# Altium PCB STM32.PcbDoc
Units mm, origin at the board's own origin, x right, y up, seen from the top; angles counter-clockwise.
Board outline 35 x 41 mm, 4 copper layers (Top Layer, L2 (GND), L3 (GND), Bottom Layer), stack 2.11 mm thick; 35 components, 27 nets, 176 pads, 107 vias.
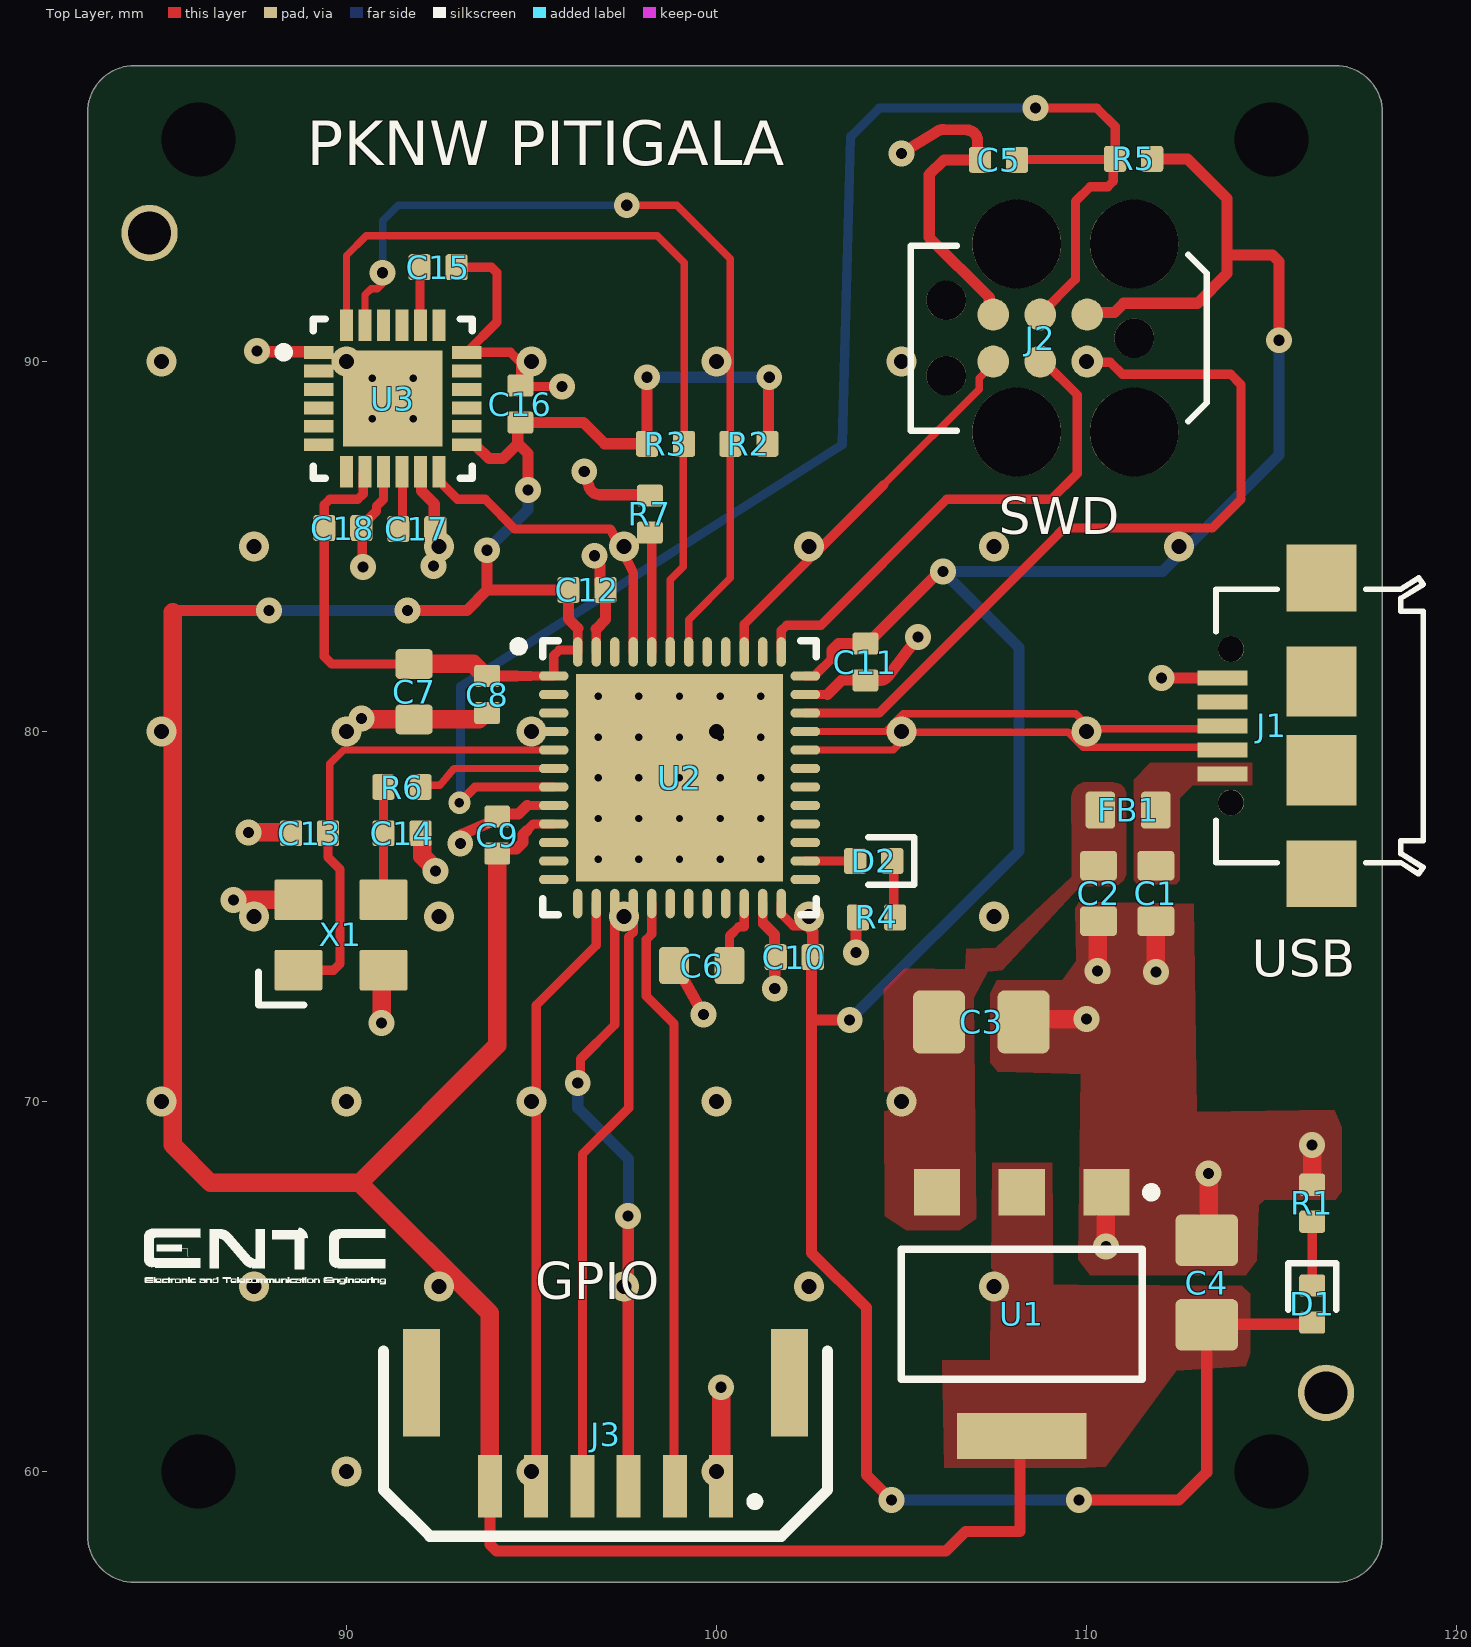
[diagram p0: Top Layer view]
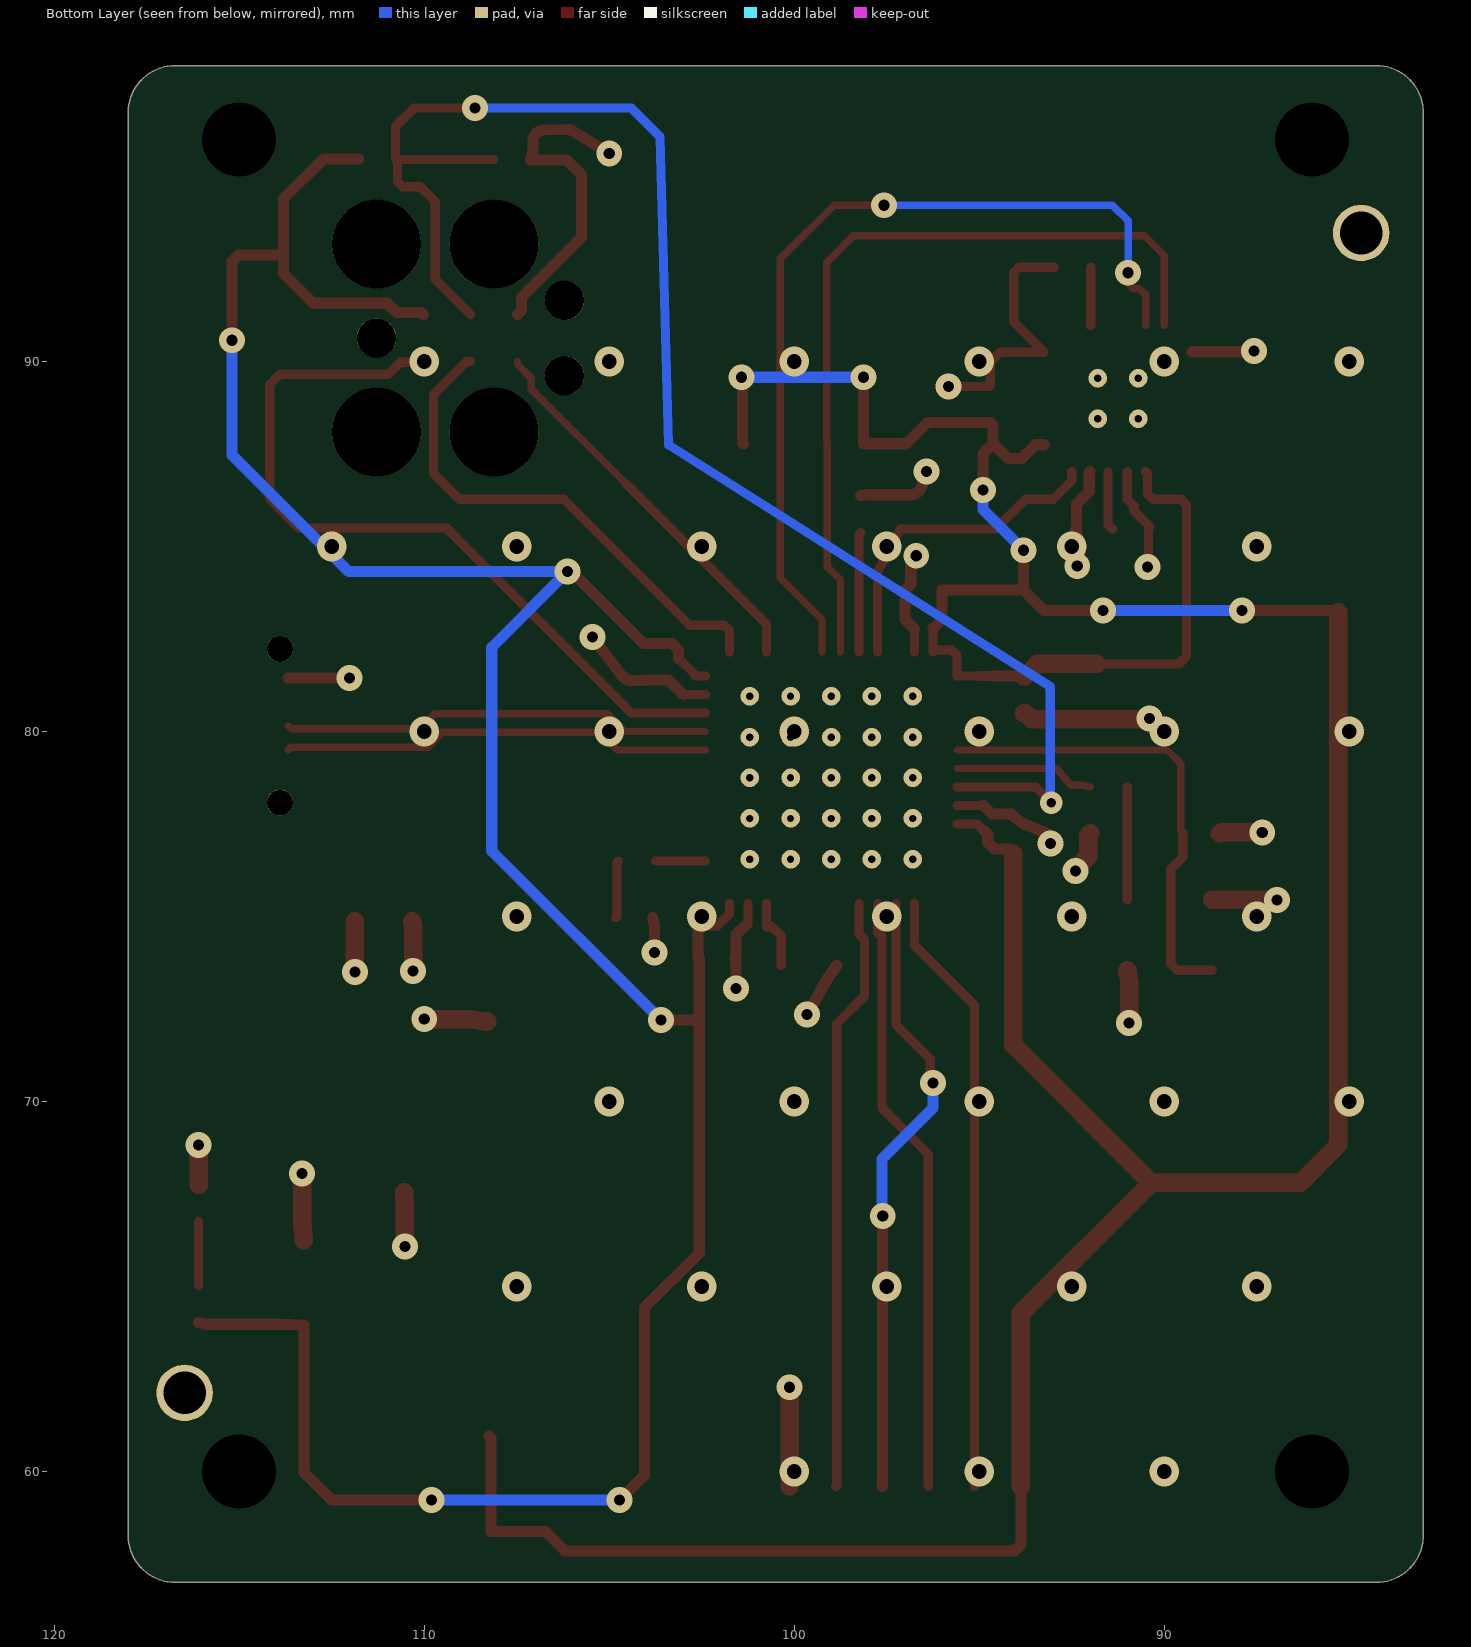
[diagram p1: Bottom Layer view, seen from below]
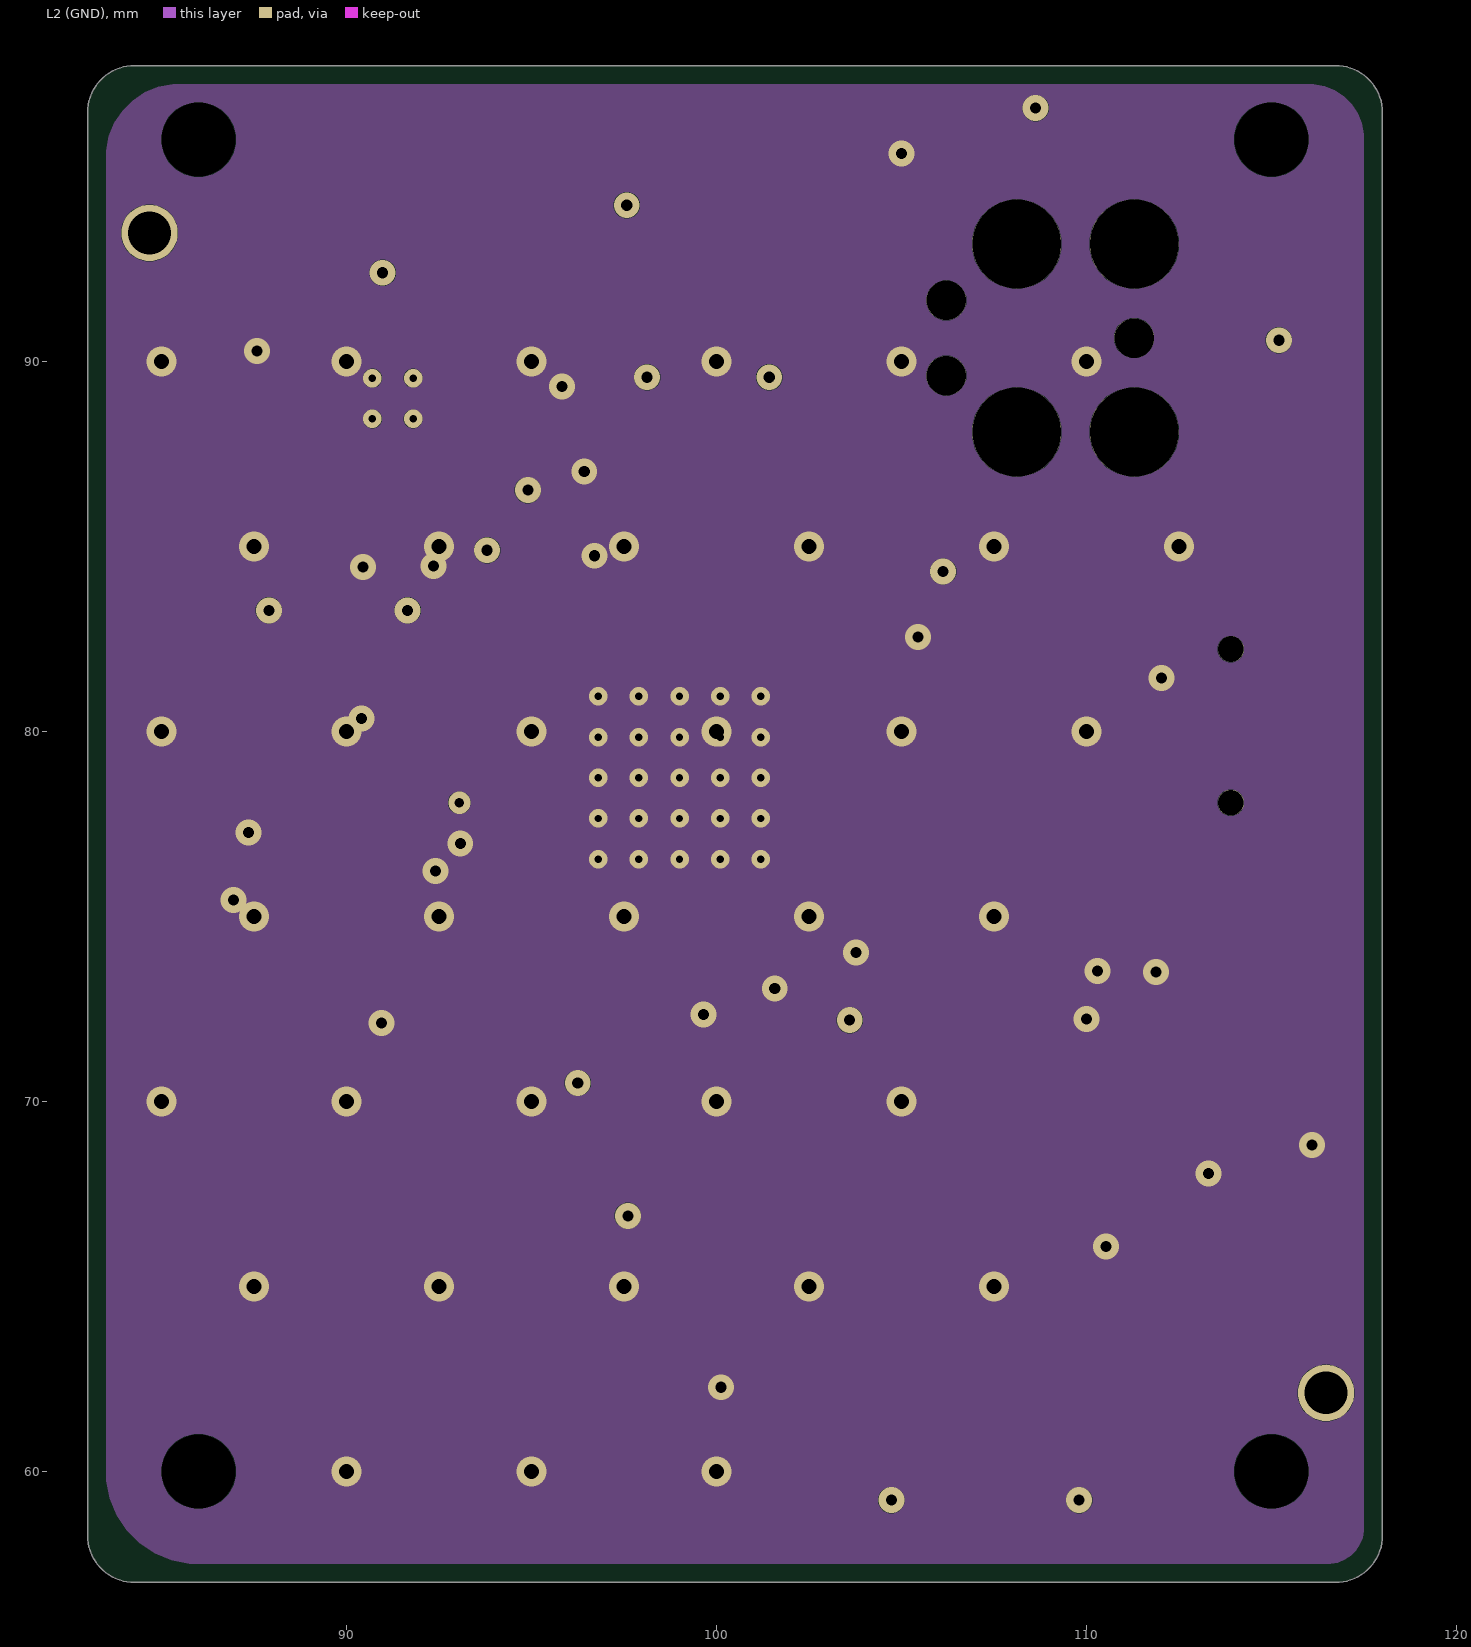
[diagram p2: L2 (GND)]
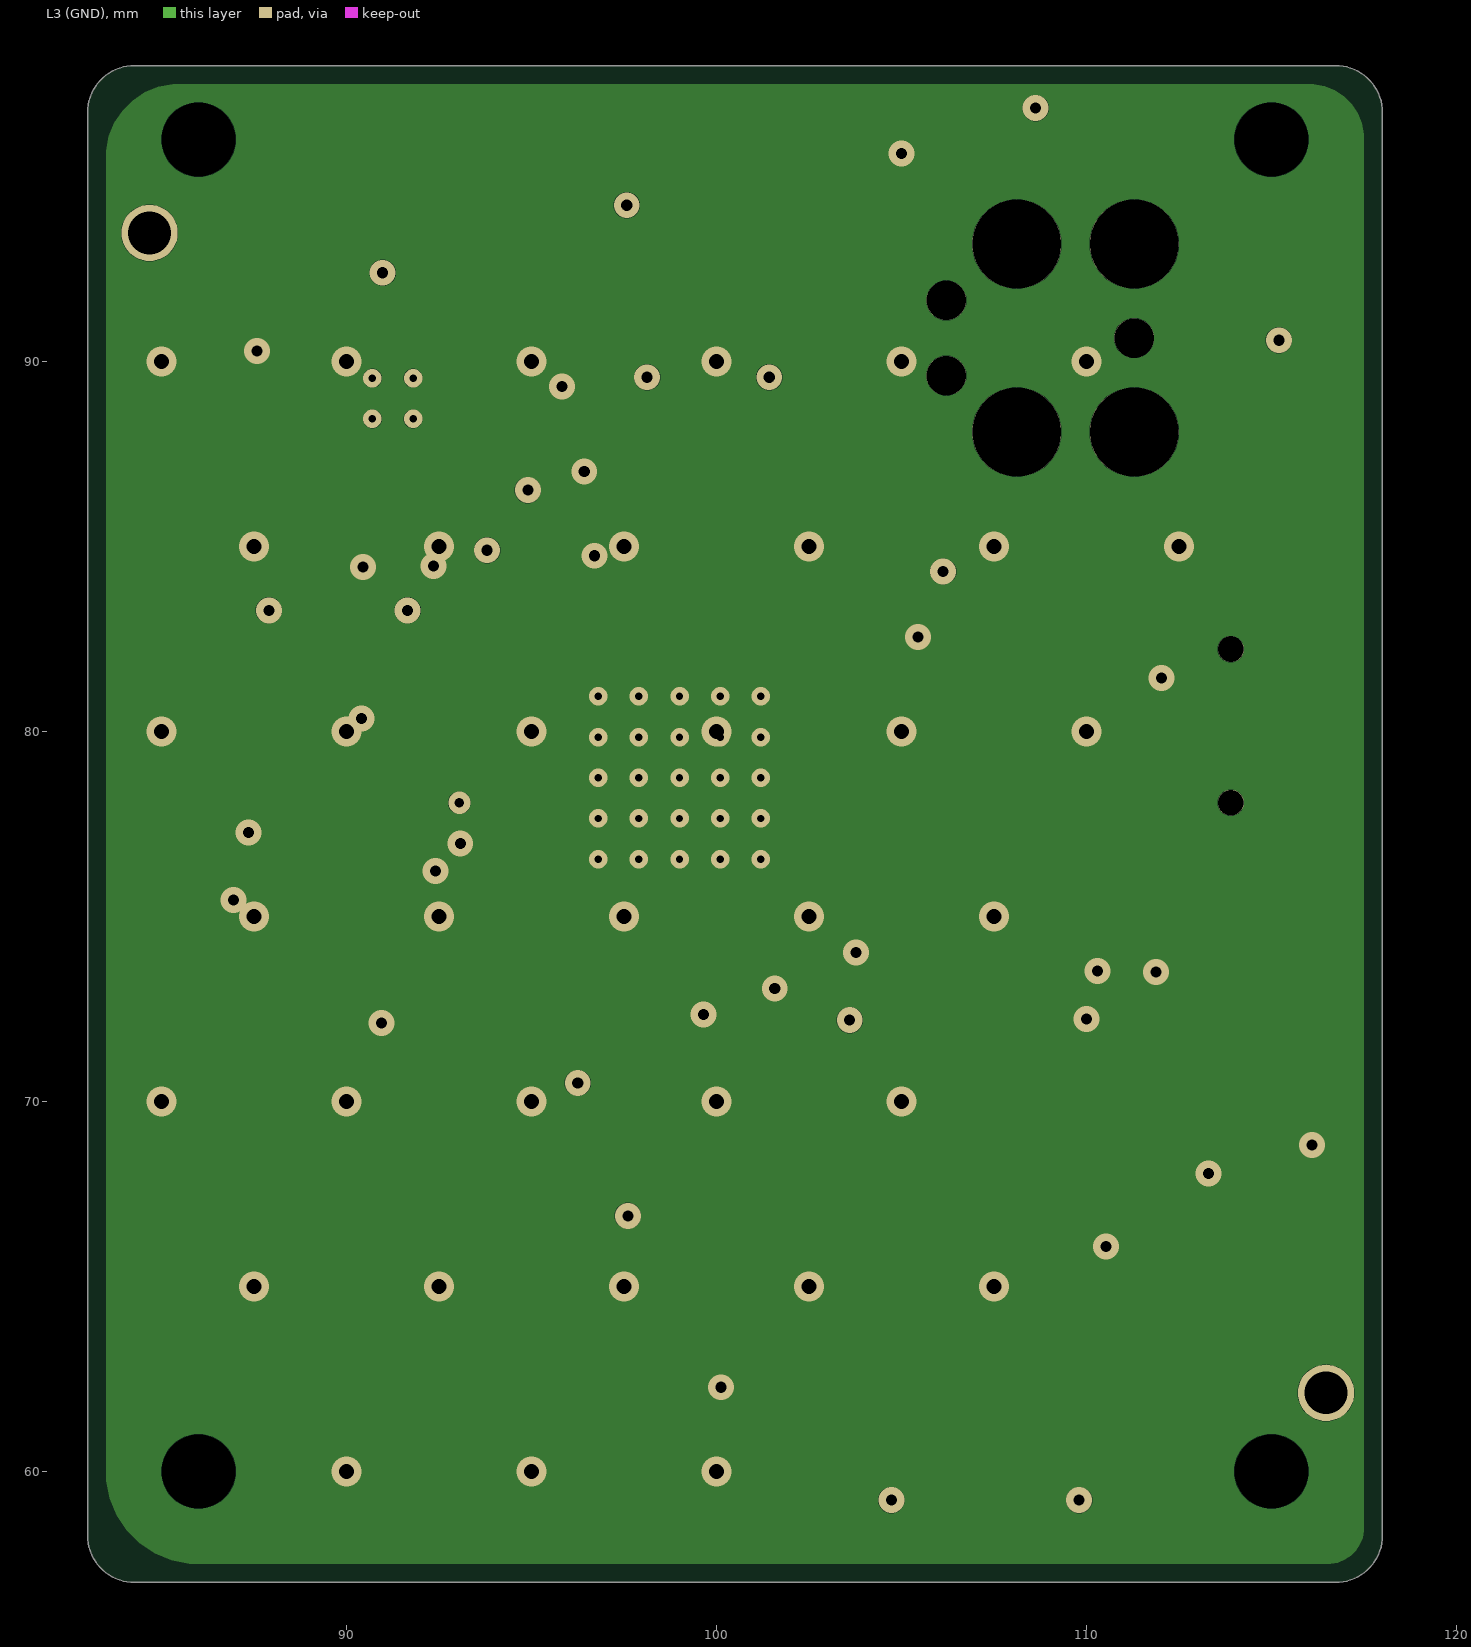
[diagram p3: L3 (GND)]
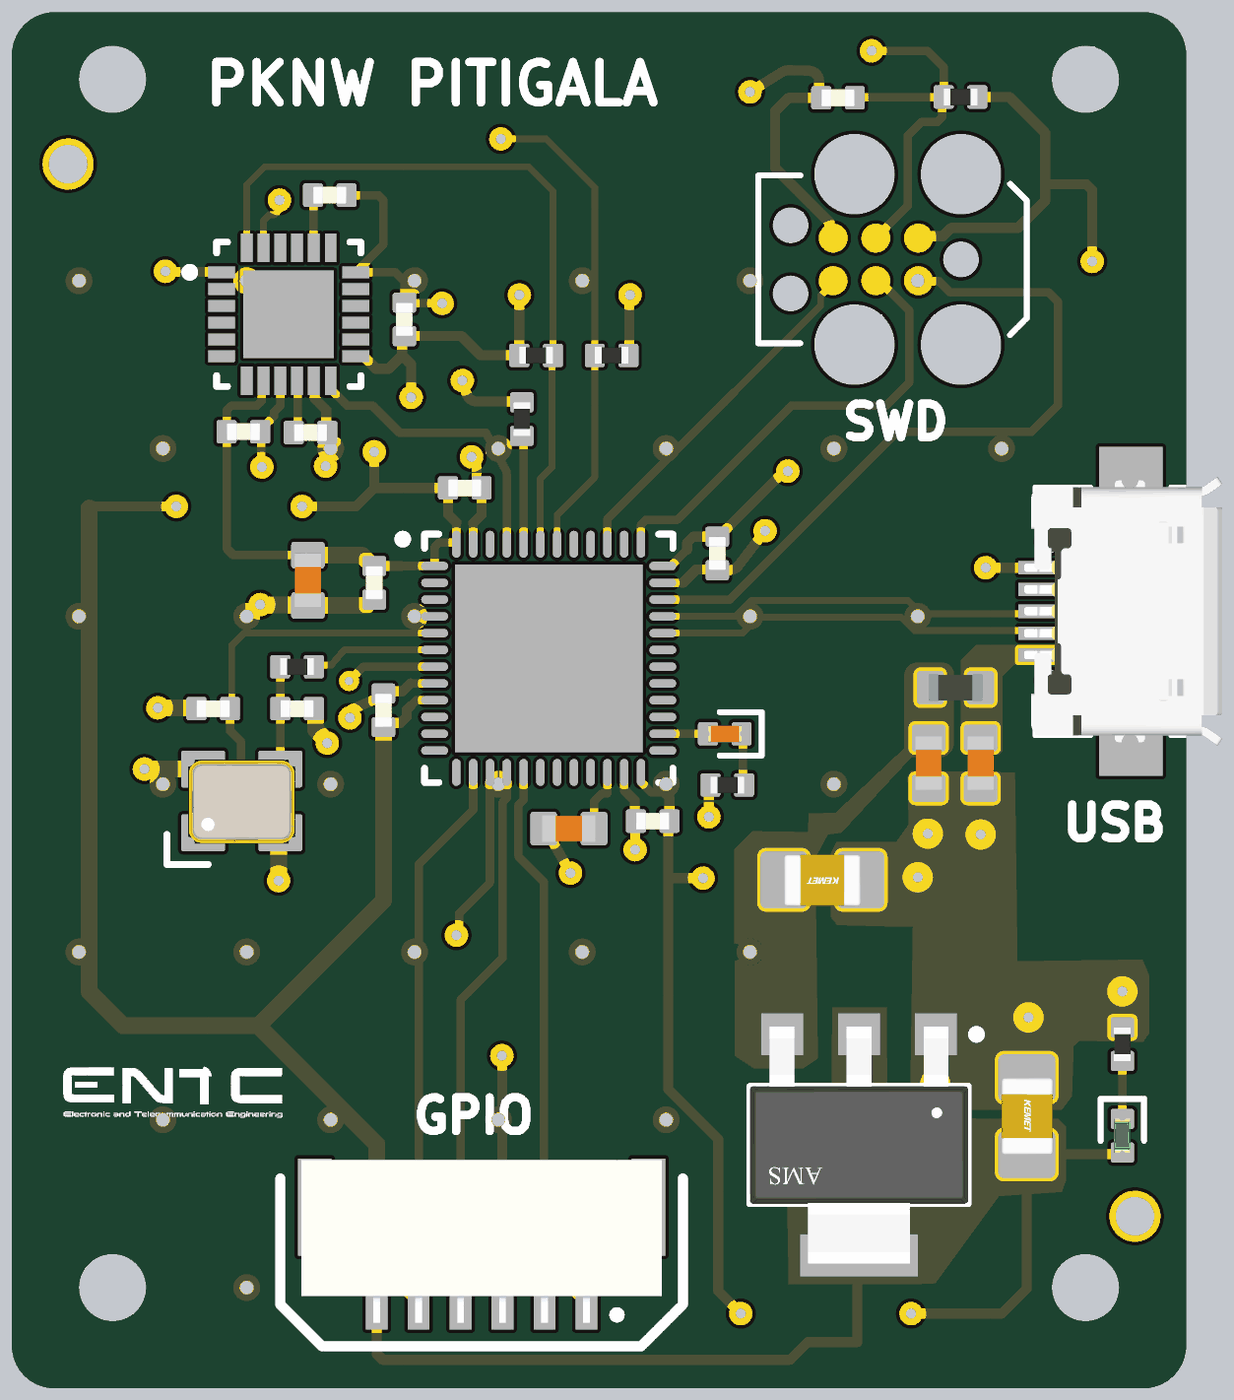
[diagram p4: 3D render of the assembled board from above, using the file's embedded part models]

## Layer stack, top to bottom
Top Solder: solder mask 0.0254, SM-001, Dk 4
Top Layer: signal copper 0.035
Dielectric 1: prepreg 0.2, PP-017, Dk 4.6
L2 (GND): signal copper 0.0175
Dielectric 3: core 1.605, Core-039, Dk 4.6
L3 (GND): signal copper 0.0175
Dielectric 5: prepreg 0.2, PP-017, Dk 4.6
Bottom Layer: signal copper 0.035
Bottom Solder: solder mask 0.0254, SM-001, Dk 4

## Board outline
83,58.27 83,96.73 cw(c84.27,96.73) 84.27,98 116.73,98 cw(c116.73,96.73) 118,96.73 118,58.27 cw(c116.73,58.27) 116.73,57 84.27,57 cw(c84.27,58.27)

## Design rules (kind name [scope] priority, off if disabled: settings)
AssemblyTestPointUsage [All] p1: isadvanced=TRUE
AssemblyTestpoint [All] p1: isadvanced=TRUE testpointundercomponent=TRUE minsize=1.016 maxsize=2.54 preferedsize=1.524 minholesize=0 maxholesize=1.016 preferedholesize=0.813 testpointgrid=0.025 usegrid=TRUE gridtolerance=0 allowsidetop=TRUE allowsidebottom=TRUE
Clearance Clearance_1 [All] p1: isadvanced=TRUE gap=0 ignorepadtopadclearanceinfootprint=FALSE
Clearance Clearance_1 [(ExistsOnLayer('L2 (GND)') Or ExistsOnLayer('L3 (GND)')) vs (ExistsOnLayer('L2 (GND)') Or ExistsOnLayer('L3 (GND)'))] p2: gap=0.254 ignorepadtopadclearanceinfootprint=TRUE sourcerule=65 cellrowname=All cellrowtype=0 cellcolname=All cellcoltype=0 innerlayers=TRUE
Clearance Clearance_2 [(ExistsOnLayer('Top Layer') Or ExistsOnLayer('Bottom Layer')) vs (ExistsOnLayer('Top Layer') Or ExistsOnLayer('Bottom Layer'))] p3: gap=0.254 ignorepadtopadclearanceinfootprint=TRUE sourcerule=65 cellrowname=All cellrowtype=0 cellcolname=All cellcoltype=0 outerlayers=TRUE
Clearance [All] p4: gap=0.254 ignorepadtopadclearanceinfootprint=TRUE ismatrix=TRUE
ComponentClearance [All] p1: isadvanced=TRUE gap=0.254 collisioncheckmode=3 verticalgap=0.254 showdistances=FALSE
DiffPairsRouting DifferentialPairsRouting_1 [All] p1: isadvanced=TRUE maxlimit=0.3 minlimit=0.2 mostfreqgap=0.254 toplayer_prefgap=0.203 toplayer_minwidth=0.2 toplayer_maxwidth=0.5 toplayer_prefwidth=0.26 bottomlayer_prefgap=0.203 bottomlayer_minwidth=0.2 bottomlayer_maxwidth=0.5 bottomlayer_prefwidth=0.26 impedanceprofiledriven=TRUE impedanceprofileid={82A9CC14-BCE7-4DAF-8520-620A27693682} impedanceprofilevalue=90.000000 maxuncoupledlength=0.254
DiffPairsRouting DifferentialPairsRouting_2 [All] p2: maxlimit=0.254 minlimit=0.254 mostfreqgap=0.254 toplayer_prefgap=0.203 toplayer_minwidth=0.381 toplayer_maxwidth=0.381 toplayer_prefwidth=0.26 bottomlayer_prefgap=0.203 bottomlayer_minwidth=0.381 bottomlayer_maxwidth=0.381 bottomlayer_prefwidth=0.26 impedanceprofiledriven=TRUE impedanceprofileid={82A9CC14-BCE7-4DAF-8520-620A27693682} impedanceprofilevalue=90.000000 maxuncoupledlength=12.7
FabricationTestPointUsage [All] p1: isadvanced=TRUE valid=0 allowmultiple=FALSE
FabricationTestpoint [All] p1: isadvanced=TRUE side=3 testpointundercomponent=TRUE minsize=1.016 maxsize=2.54 preferedsize=1.524 minholesize=0 maxholesize=1.016 preferedholesize=0.813 testpointgrid=0.025 allowsidetop=TRUE allowsidebottom=TRUE usegrid=TRUE gridtolerance=0
FanoutControl Fanout_BGA [IsBGA] p1: isadvanced=TRUE bgadir=Out bgaviamode=Centered fanoutstyle=Auto fanoutdirection=Alternating viagrid=0.025 // Fanout_BGA (Default Rule)
FanoutControl Fanout_LCC [IsLCC] p2: isadvanced=TRUE bgadir=Out bgaviamode=Centered fanoutstyle=Auto fanoutdirection=Alternating viagrid=0.025 // Fanout_LCC (Default Rule)
FanoutControl Fanout_SOIC [IsSOIC] p3: isadvanced=TRUE bgadir=Out bgaviamode=Centered fanoutstyle=Auto fanoutdirection=Alternating viagrid=0.025 // Fanout_SOIC (Default Rule)
FanoutControl Fanout_Small [(CompPinCount < 5)] p4: isadvanced=TRUE bgadir=Out bgaviamode=Centered fanoutstyle=Auto fanoutdirection=OutThenIn viagrid=0.025 // Fanout_Small (Default Rule)
FanoutControl Fanout_Default [All] p5: isadvanced=TRUE bgadir=Out bgaviamode=Centered fanoutstyle=Auto fanoutdirection=Alternating viagrid=0.025 // Fanout_Default (Default Rule)
Height [All] p1: isadvanced=TRUE minheight=0 maxheight=25.4 prefheight=12.7
HoleSize [All] p1: isadvanced=TRUE absolutevalues=TRUE maxlimit=2.54 minlimit=0.025 maxpercent=80.000 minpercent=20.000
HoleToHoleClearance [All] p1: isadvanced=TRUE gap=0.254 allowstackedmicrovias=TRUE
LayerPairs [All] p1: isadvanced=TRUE enforce=TRUE
MinimumSolderMaskSliver [All] p1: isadvanced=TRUE minsoldermaskwidth=0
NetAntennae [All] p1: isadvanced=TRUE netantennaetolerance=0
PasteMaskExpansion [All] p1: isadvanced=TRUE expansion=0
PlaneClearance [All] p1: isadvanced=TRUE clearance=0.508
PlaneConnect [All] p1: isadvanced=TRUE planeconnectstyle=Relief reliefexpansion=0.508 reliefentries=4 reliefconductorwidth=0.254 reliefairgap=0.254
PolygonConnect PolygonConnectStyle_1 [All] p1: isadvanced=TRUE connectstyle=Direct reliefconductorwidth=0.254 reliefentries=2 polygonreliefangle="0 Angle" airgapwidth=0.254
PolygonConnect [All] p2: connectstyle=Relief reliefconductorwidth=0.254 reliefentries=4 polygonreliefangle="90 Angle" airgapwidth=0.254
RoutingCorners [All] p1: isadvanced=TRUE cornerstyle=45-Degree minsetback=2.54 maxsetback=2.54
RoutingPriority [All] p1: isadvanced=TRUE routingpriority=0
RoutingVias RoutingViaStyle_1 [All] p1: isadvanced=TRUE holewidth=0.254 width=0.5 viastyle="Through Hole" minholewidth=0 minwidth=0.3 maxholewidth=0.7 maxwidth=0.7
RoutingVias [All] p2: holewidth=0.711 width=1.27 viastyle="Through Hole" minholewidth=0.711 minwidth=1.27 maxholewidth=0.711 maxwidth=1.27
ShortCircuit [All] p1: isadvanced=TRUE allowed=FALSE
SilkToSilkClearance [All] p1: isadvanced=TRUE silktosilkclearance=0.1
SilkToSolderMaskClearance [IsPad] p1: isadvanced=TRUE minsilkscreentomaskgap=0.1 clearancetoexposedcopper=TRUE
SolderMaskExpansion [All] p1: isadvanced=TRUE expansion=0.102 istentingtop=FALSE
SupplyNets "Schematic Supply Nets_23" [InNet('+3V3')] p1: isadvanced=TRUE voltage=0.000
SupplyNets "Schematic Supply Nets_22" [InNet('+5V')] p2: isadvanced=TRUE voltage=0.000
SupplyNets "Schematic Supply Nets_21" [InNet('GND')] p3: isadvanced=TRUE voltage=0.000
SupplyNets "Schematic Supply Nets_20" [InNet('VBUS')] p4: isadvanced=TRUE voltage=0.000
SupplyNets "Schematic Supply Nets_19" [InNet('+3V3')] p5: isadvanced=TRUE voltage=0.000
SupplyNets "Schematic Supply Nets_18" [InNet('+5V')] p6: isadvanced=TRUE voltage=0.000
SupplyNets "Schematic Supply Nets_17" [InNet('GND')] p7: isadvanced=TRUE voltage=0.000
SupplyNets "Schematic Supply Nets_16" [InNet('VBUS')] p8: isadvanced=TRUE voltage=0.000
SupplyNets "Schematic Supply Nets_15" [InNet('+5V')] p9: isadvanced=TRUE voltage=0.000
SupplyNets "Schematic Supply Nets_14" [InNet('+3V3')] p10: isadvanced=TRUE voltage=0.000
SupplyNets "Schematic Supply Nets_13" [InNet('VBUS')] p11: isadvanced=TRUE voltage=0.000
SupplyNets "Schematic Supply Nets_12" [InNet('GND')] p12: isadvanced=TRUE voltage=0.000
SupplyNets "Schematic Supply Nets_11" [InNet('+5V')] p13: isadvanced=TRUE voltage=0.000
SupplyNets "Schematic Supply Nets_10" [InNet('VBUS')] p14: isadvanced=TRUE voltage=0.000
SupplyNets "Schematic Supply Nets_9" [InNet('GND')] p15: isadvanced=TRUE voltage=0.000
SupplyNets "Schematic Supply Nets_8" [InNet('+3V3')] p16: isadvanced=TRUE voltage=0.000
SupplyNets "Schematic Supply Nets_7" [InNet('VBUS')] p17: isadvanced=TRUE voltage=0.000
SupplyNets "Schematic Supply Nets_6" [InNet('+5V')] p18: isadvanced=TRUE voltage=0.000
SupplyNets "Schematic Supply Nets_5" [InNet('+3V3')] p19: isadvanced=TRUE voltage=0.000
SupplyNets "Schematic Supply Nets_4" [InNet('GND')] p20: isadvanced=TRUE voltage=0.000
SupplyNets "Schematic Supply Nets_3" [InNet('VBUS')] p21: isadvanced=TRUE voltage=0.000
SupplyNets "Schematic Supply Nets_2" [InNet('GND')] p22: isadvanced=TRUE voltage=0.000
SupplyNets "Schematic Supply Nets_1" [InNet('+5V')] p23: isadvanced=TRUE voltage=0.000
SupplyNets "Schematic Supply Nets" [InNet('+3V3')] p24: isadvanced=TRUE voltage=0.000
UnRoutedNet [All] p1: isadvanced=TRUE checkbadconnections=TRUE
UnpouredPolygon [All] p1: isadvanced=TRUE
Width MaxMinWidth_2 [All] p1: isadvanced=TRUE maxlimit=0.5 minlimit=0.2 preferedwidth=0.3 minimp=50.000000 maximp=50.000000 favimp=50.000000
Width MaxMinWidth_1 [All] p2: maxlimit=0.254 minlimit=0.254 preferedwidth=0.254
3 further rules are at their usual default settings.

## Classes and differential pairs
differential pair D_USB_D: +USB_D_P -USB_D_N

## Components (designator, comment, footprint, x,y, rotation, side; value= is the part's Value field where it differs from the comment)
C1 "2u2" CAP_0603 111.875,75.625 r90 top
C2 "2u2" CAP_0603 110.325,75.625 r90 top
C3 "22u" CAP_0805 107.157,72.15 r180 top
C4 "22u" CAP_0805 113.25,65.107 r270 top
C5 "100n" CAP_0402 107.625,95.45 r0 top
C6 "2u2" CAP_0603 99.6,73.675 r0 top
C7 "2u2" CAP_0603 91.825,81.075 r90 top
C8 "100n" CAP_0402 93.8,81 r90 top
C9 "100n" CAP_0402 94.075,77.2 r270 top
C10 "100n" CAP_0402 102.1,73.9 r0 top
C11 "100n" CAP_0402 104.025,81.875 r90 top
C12 "100n" CAP_0402 96.5,83.825 r180 top
C13 "10p" CAP_0402 89,77.25 r0 top
C14 "10p" CAP_0402 91.5,77.25 r180 top
C15 "2n2" CAP_0402 92.475,92.55 r180 top
C16 "10n" CAP_0402 94.7,88.85 r270 top
C17 "100n" CAP_0402 91.9,85.475 r180 top
C18 "100n" CAP_0402 89.9,85.5 r180 top
D1 "GREEN" LED_0402_GREEN 116.1,64.525 r90 top
D2 "RED" LED_0402_RED 104.25,76.5 r0 top
FB1 "120R" FB_0603 111.125,77.875 r180 top
J1 "629105136821" 629105136821 116.35,80.15 r90 top
J2 "TC2030" TC2030-FP 108.75,90.635 r180 top
J3 "SM06B-GHS-TB" SM06B-GHS-TB 97,61 r180 top
R1 "1K" RES_0402 116.1,67.25 r270 top
R2 "2k2" RES_0402 100.875,87.775 r0 top
R3 "2k2" RES_0402 98.625,87.775 r180 top
R4 "10k" RES_0402 104.325,74.975 r0 top
R5 "10k" RES_0402 111.275,95.475 r0 top
R6 "0R" RES_0402 91.5,78.5 r180 top
R7 "10k" RES_0402 98.2,85.875 r270 top
U1 "AMS1117-3.3" FP-AMS1117-IPC_C 108.25,64.25 r270 top
U2 "STM32F411CEU6" STM-UFQFPN48_L 99,78.75 r0 top
U3 "MPU-6050" IS-QFN-24_V 91.25,89 r0 top
X1 "24MHz" XTAL_3225 89.85,74.5 r0 top

## Footprints (in the part's own frame and the unit in brackets; to place one, negate y for a bottom-side part, rotate by r counter-clockwise, add the part's x,y. Pads: shape width x height; smd on the part's side, far side on the other; paste and mask are expansions set on the pad)
629105136821 [mm] "Micro USB 2.0 SMT Type B Horizontal 5 Contacts"
  rect 0.4x1.35 smd: 1(-1.3,2.675) 2(-0.65,2.675) 3(0,2.675) 4(0.65,2.675) 5(1.3,2.675)
  round 0.7 hole 0.7 unplated: MH1(-2.075,2.45) MH2(2.075,2.45)
  rect 1.8x1.9 smd: Shell(-4,0) Shell(4,0)
  rect 1.9x1.9 smd: Shell(-1.2,0) Shell(1.2,0)
  silkscreen extent -4,-2.75 4,2.85, body extent -4,-2.73 4,3.17, height 2.69
CAP_0402 [mm]
  rrect25% 0.6x0.7 smd: 1(-0.5,0) 2(0.5,0)
  body extent -0.5,-0.26 0.5,0.26, height 0.37
CAP_0603 [mm]
  rrect25% 0.8x1 smd: 1(-0.75,0) 2(0.75,0)
  body extent -0.8,-0.4 0.8,0.4, height 0.51
CAP_0805 [mm]
  rrect25% 1.4x1.7 smd: 1(-1.143,0) 2(1.143,0)
  body extent -1.15,-0.76 1.15,0.79, height 1.01
FB_0603 [mm]
  rrect25% 0.8x1 smd: 1(-0.75,0) 2(0.75,0)
  body extent -0.8,-0.4 0.8,0.4, height 0.81
FP-AMS1117-IPC_C [mm]
  rect 1.25x1.25 smd paste+0 mask+0: 1(-3.295,2.29) 2(-3.295,0) 3(-3.295,-2.29)
  rect 1.25x3.5 smd paste+0 mask+0: 4(3.295,0)
  silkscreen extent -3.42,-3.25 1.75,3.63, body extent -3.9,-3.35 3.9,3.35, height 0.25
IS-QFN-24_V [mm] "QFN, 24-Leads, Body 4x4mm, Pitch 0.5mm, Thermal Pad 2.7x2.6mm"
  rect 0.8x0.35 smd: 1(-2,1.25) 2(-2,0.75) 3(-2,0.25) 4(-2,-0.25) 5(-2,-0.75) 6(-2,-1.25) 13(2,-1.25) 14(2,-0.75) 15(2,-0.25) 16(2,0.25) 17(2,0.75) 18(2,1.25)
  rect 0.35x0.85 smd mask+0.102: 7(-1.25,-1.975) 8(-0.75,-1.975) 9(-0.25,-1.975) 10(0.25,-1.975) 11(0.75,-1.975) 12(1.25,-1.975) 19(1.25,1.975) 20(0.75,1.975) 21(0.25,1.975) 22(-0.25,1.975) 23(-0.75,1.975) 24(-1.25,1.975)
  rect 2.7x2.6 smd: 25(0,0)
  silkscreen extent -3.07,-2.15 2.15,2.15, body extent -2,-2 2,2, height 0.95
LED_0402_GREEN [mm]
  rrect25% 0.6x0.7 smd: A(-0.5,0) K(0.5,0)
  silkscreen extent -0.15,-0.65 1.1,0.65, body extent -0.51,-0.25 0.51,0.25, height 0.45
LED_0402_RED [mm]
  rrect25% 0.6x0.7 smd: A(-0.5,0) K(0.5,0)
  silkscreen extent -0.15,-0.65 1.1,0.65, body extent -0.51,-0.25 0.51,0.25, height 0.45
RES_0402 [mm]
  rrect25% 0.6x0.7 smd: 1(-0.5,0) 2(0.5,0)
  body extent -0.5,-0.25 0.5,0.25, height 0.3
SM06B-GHS-TB [mm]
  rect 0.65x1.7 smd: 1(-3.125,1.4) 2(-1.875,1.4) 3(-0.625,1.4) 4(0.625,1.4) 5(1.875,1.4) 6(3.125,1.4)
  rect 1x2.9 smd: ""(-4.975,-1.4) ""(4.975,-1.4)
  silkscreen extent -6,-2.25 6,2.75, body extent -5.38,-2.8 5.38,2.05, height 4.26
STM-UFQFPN48_L [mm] "QFN, 48-Leads, Body 7.1x7.1mm, Pitch 0.5mm, Thermal Pad 5.6x5.6mm, IPC High Density"
  oval 0.8x0.25 smd: 1(-3.4,2.75) 2(-3.4,2.25) 3(-3.4,1.75) 4(-3.4,1.25) 5(-3.4,0.75) 6(-3.4,0.25) 7(-3.4,-0.25) 8(-3.4,-0.75) 9(-3.4,-1.25) 10(-3.4,-1.75) 11(-3.4,-2.25) 12(-3.4,-2.75) 25(3.4,-2.75) 26(3.4,-2.25) 27(3.4,-1.75) 28(3.4,-1.25) 29(3.4,-0.75) 30(3.4,-0.25) 31(3.4,0.25) 32(3.4,0.75) 33(3.4,1.25) 34(3.4,1.75) 35(3.4,2.25) 36(3.4,2.75)
  oval 0.25x0.8 smd: 13(-2.75,-3.4) 14(-2.25,-3.4) 15(-1.75,-3.4) 16(-1.25,-3.4) 17(-0.75,-3.4) 18(-0.25,-3.4) 19(0.25,-3.4) 20(0.75,-3.4) 21(1.25,-3.4) 22(1.75,-3.4) 23(2.25,-3.4) 24(2.75,-3.4) 37(2.75,3.4) 38(2.25,3.4) 39(1.75,3.4) 40(1.25,3.4) 41(0.75,3.4) 42(0.25,3.4) 43(-0.25,3.4) 44(-0.75,3.4) 45(-1.25,3.4) 46(-1.75,3.4) 47(-2.25,3.4) 48(-2.75,3.4)
  rect 5.6x5.6 smd: 49(0,0)
  silkscreen extent -4.47,-3.7 3.7,3.7, body extent -3.55,-3.55 3.55,3.55, height 0.6
TC2030-FP [mm]
  round 0.863 smd paste-0.432: 1(-1.27,-0.635) 2(-1.27,0.635) 3(0,-0.635) 4(0,0.635) 5(1.27,-0.635) 6(1.27,0.635)
  round 2.4 hole 2.4 unplated: MH(-2.54,2.54) MH(-2.54,-2.54) MH(0.635,2.54) MH(0.635,-2.54)
  round 1.067 hole 1.067 unplated: MH(-2.54,0) MH(2.54,-1.016) MH(2.54,1.016)
  silkscreen extent -4.5,-2.5 3.5,2.5
XTAL_3225 [mm]
  rrect10% 1.3x1.1 smd: 1(-1.15,-0.95) 2(1.15,-0.95) 3(1.15,0.95) 4(-1.15,0.95)
  silkscreen extent -2.23,-1.89 -1,-1, body extent -1.6,-1.28 1.6,1.22, height 0.61

## Part data
C1 C2 C6 C7: library part CAP_0603, "Capacitor SMD 0603 16V"
C3 C4: library part CAP_0805, "Capacitor SMD 0805 16V"
C5 C8 C9 C10 C11 C12 C13 C14 C15 C16 C17 C18: library part CAP_0402, "Capacitor SMD 0402 16V"
D1: library part LED_0402_GREEN, "LED 0402 GREEN SMD"
D2: library part LED_0402_RED, "LED 0402 RED SMD"
FB1: library part FB_0603, "Ferrite Bead SMD 0603"
J1: library part CMP-1502-03253-2, Color=Black, Contact Resistance=30mΩ, Current Rating=1A, Flammability Rating="UL94 V-0", Insulation Resistance=1GΩ, Max Operating Temperature=105°C, Min Operating Temperature=-40°C, Operating Supply Voltage=30V, Connector Type=USB, Contact Material=Copper, Contact Plating=Gold, Gender=Receptacle, Height=2.9mm, Lead Free="Lead Free", Length=5.9mm, Mount="Horizontal, Surface Mount", NexarPartId=19991173, Number Of Contacts=5, Number of Pins=5, Number of Ports=1, Number of Positions=5, Orientation=Horizontal, Packaging="Tape and Reel", Plating=Nickel, REACH SVHC=Unknown, RoHS=Compliant, Termination=Solder, Usb Standard="USB 2.0", Voltage Rating=30V
J2: "Tag-Connect No-Solder SWD Debug Connector DO NOT PLACE", Manufacturer=Tag-Connect, Manufacturer Part Number=TC2030
J3: "Header Connector 6 Position 1.25MM Pitch SMD Horizontal JST GH", Manufacturer=JST, Manufacturer Part Number=SM06B-GHS-TB
R1 R2 R3 R4 R5 R6 R7: library part RES_0402, "Resistor SMD 0402"
U1: library part CMP-209535-000001-1, "LDO Voltage Regulators 1A, 3.3V", Dropout Voltage=1.1V, Manufacturer="Advanced Monolithic Systems", Max Junction Temp=+125°C, Max Power Dissipation=1.2W, Max Supply Voltage=15V, Nominal Supply Current=5mA, Output Current=1A, Output Voltage=3.3V, Package=AMS1117, Temperature="-40°C to +125°C", Temperature Range Low=-40°C, Automotive=No, Category=IC, ComponentLink2Description=Datasheet, ComponentLink2URL=http://www.advanced-monolithic.com/pdf/ds1117.pdf, Device Class L1="Integrated Circuits (ICs)", Device Class L2="Power Management ICs", Device Class L3="Voltage Regulators - Linear", Height=1.8mm, Ipc Land Pattern Name=SOT229P700X180-4, Lead Free=Yes, Manufacturer Part Number=AMS1117-3.3, Number Of Outputs=1, Octopart=https://octopart.com/ams1117-3.3-advanced+monolithic+systems-25899300, Output Type=Fixed, RoHS=TRUE, Standoff Height=0.64mm, Temperature Range High=+125°C
U2: library part CMP-0243-00165-1, "ARM Cortex-M4 32-bit MCU+FPU, 512 KB Flash, 128 KB RAM, 36 I/Os, 48-Pin UFQFPN, -40 to 85 degC, Tray", I/Os (High Current)=36, Operating Frequency(F) (Processor speed) (MHz)=100, Package Description=UFQFPN48, Package Reference="48-Pin Ultra Thin Fine Pitch Quad Flat No-Lead, 7 x 7 x 0.6 mm Body, 0.5 mm Pitch, Exposed Pad", Supply Voltage(Vcc) min (V)=1.7, ComponentLink1Description="Manufacturer URL", ComponentLink1URL=http://www.st.com/, ComponentLink2Description=Datasheet, ComponentLink2URL=http://www.st.com/st-web-ui/static/active/en/resource/technical/document/datasheet/DM00115249.pdf, Core="ARM Cortex-M4", DatasheetVersion="Rev. 6", FLASH Size (Prog) (kB)=512, Internal RAM Size (kB)=128, Mounting Technology="Surface Mount", Packing=Tray
U3: library part CMP-1753-00002-2, "3-Axis Gyroscope, Accelerometer and a Digital Motion Processor(TM) (DMP), 2.375 to 3.46 V, -40 to 85 degC, 24-Pin QFN, RoHS, Tape and Reel", Manufacturer=InvenSense, Standard Package=5,000, Category=Sensors,Transducers, Datasheet URL=http://datasheet.octopart.com/MPU-6050-InvenSense-datasheet-14421344.pdf, Datasheet Version="Rev. 3.3, 05/2012", Dynamic Catalog=MPU-6000™Series, Family=Multifunction, Featured Product=MPU-60506-Axis,IntegratedI²CSolution, Manufacturer URL=http://www.invensense.com/, Online Catalog=MPU-6000™Series, Other Names="1428-1007-2 / MPU6050", Output Type=Digital, Sensor Type=MotionTracking, Unit PriceUSD=Digital
X1: library part TSX-3225_24.0000MF15X-AC, "Crystal SMD 24MHz 10PPM 7pF 3225", Manufacturer=Epson, Manufacturer Part Number="TSX-3225 24.0000MF15X-AC"

## Free pads (board coordinates)
  round 1.524 hole 2 unplated: MH(86,60) MH(86,96) MH(115,60) MH(115,96)
  round 1.524 hole 1.152 unplated: TH(84.675,93.475) TH(116.475,62.125)

## Via types
v1: diameter 0.7, hole 0.3, Top Layer to Bottom Layer, 41 vias
v2: diameter 0.8, hole 0.4, Top Layer to Bottom Layer, tented bottom, 36 vias
v3: diameter 0.5, hole 0.2, Top Layer to Bottom Layer, 29 vias
v4: diameter 0.6, hole 0.25, Top Layer to Bottom Layer, 1 vias

## Nets (pads, with @x,y where several pads share a name; then routed paths per layer and width w, separated by ;. In a path a pad name is that pad's centre, name@x,y a point inside that pad or via, vN(x,y) a via of type N, cw(c..) or ccw(c..) an arc to the next point about the centre after c; other vN are vias at no path point)
+3V3: C4.2 C7.2 C8.2 C9.2 C10.2 C11.2 C12.2 C16.2 C18.2 D1.A J2.1 J3.6 R2.2 R3.2 R5.2 U1.2 U1.4 U2.1 U2.9 U2.24 U2.36 U2.48 U3.8 U3.13 | length 184.6
  Top Layer w0.25: U3.8 90.45,86.975 90.45,86.421 90.304,86.275 89.546,86.275 89.4,86.129 C18.2 89.4,82.025 89.6,81.825 C7.2 ; 94.875,77.325 95.05,77.5 U2.9 ; 94.975,81.5 U2.1 95.6,82.054 95.746,82.2 U2.48@96.25,82.2 ; U2.48 U2.48@96.25,82.2 ; 96.25,82.79 U2.48@96.25,82.2 ; U2.24 101.75,75.075 102.075,74.75 102.45,74.75 ; U2.36 102.675,81.5 102.675,81.53 103.125,81.98
  Top Layer w0.275: 94.6,81.5 94.975,81.5
  Top Layer w0.3: 85.3,83.225 85.35,83.275 v1(87.9,83.275) ; v1(91.65,83.275) 93.25,83.275 93.8,83.825 ; U3.13 93.475,87.75 93.85,87.375 94.225,87.375 94.629,87.779 ; C8.2 94.6,81.5 ; v1(93.8,84.9) 93.8,83.825 ; J3.6 93.875,58.026 94.051,57.85 106.2,57.85 106.725,58.375 108.2,58.375 108.2,60.905 U1.4 ; C9.2 94.2,76.825 94.593,76.825 94.768,77 94.768,77.218 94.875,77.325 ; v1(94.9,86.525) 94.9,87.508 94.629,87.779 ; 96.25,82.79 96,83.04 C12.2 93.8,83.825 ; R3.2@98.121,87.779 96.971,87.779 96.4,88.35 C16.2 94.629,88.279 94.629,87.779 ; R3.2 v1(98.125,89.575) ; R2.2 101.4,87.8 101.4,89.55 v1(101.425,89.575) ; 102.45,74.75 102.6,74.6 C10.2 102.566,73.866 102.566,72.2 ; 103.125,81.98 103.125,82.199 103.301,82.375 C11.2 104.075,82.375 106.025,84.325 v1(106.125,84.325) ; v1(103.6,72.2) 102.566,72.2 ; v1(104.725,59.225) 104.05,59.9 104.05,64.425 102.566,65.909 102.566,72.2 ; v1(109.8,59.225) 112.5,59.225 113.25,59.975 C4.2 113.925,63.978 115.9,63.978 D1.A ; J2.1 110.078,91.328 110.753,91.328 111,91.575 112.996,91.575 113.8,92.379 113.8,92.975 ; R5.2 112.725,95.475 113.8,94.4 113.8,92.975 ; v1(115.2,90.575) 115.2,92.699 115.024,92.875 113.9,92.875 113.8,92.975
  Top Layer w0.5: 85.3,83.225 85.3,68.825 86.325,67.8 90.35,67.8 ; C7.2 93.425,81.825 93.75,81.5 C8.2 ; J3.6 93.875,64.275 90.35,67.8 ; C9.2 94.075,71.525 90.35,67.8
  Bottom Layer w0.3: v1(87.9,83.275) v1(91.65,83.275) ; v1(93.8,84.9) 94.9,86 v1(94.9,86.525) ; v1(98.125,89.575) v1(101.425,89.575) ; v1(103.6,72.2) 108.175,76.775 108.175,82.275 v1(106.125,84.325) 112.05,84.325 115.2,87.475 v1(115.2,90.575) v1@115.225,90.6 ; v1(104.725,59.225) v1(109.8,59.225)
+5V: C2.2 C3.2 FB1.2 U1.3
GND: C1.1 C2.1 C3.1 C4.1 C5.1 C6.1 C7.1 C8.1 C9.1 C10.1 C11.1 C12.1 C13.1 C14.1 C15.1 C16.1 C17.1 C18.1 J1.5 J2.5 J3.1 R1.1 R4.1 R7.1 U1.1 U2.8 U2.23 U2.35 U2.47 U2.49 U3.1 U3.9 U3.11 U3.18 X1.2 X1.4 | length 61.7
  Top Layer w0.25: C18.1 90.425,85.475 90.425,84.475 v1(90.45,84.45) ; C18.1@90.4,85.55 90.812,85.962 90.812,86.087 91,86.275 U3.9 ; C15.1 93.92,92.55 94.066,92.404 94.066,91.066 U3.18 94.429,90.25 94.7,89.979 C16.1 94.725,89.325 v1(95.825,89.325) ; 94.883,78 U2.8 ; U2.47 96.75,82.775 ; 101.25,74.8 U2.23 ; U2.35 103,81
  Top Layer w0.3: v1(87.575,90.281) 87.59,90.266 89.234,90.266 U3.1@89.242,90.258 ; U3.11 92.025,87 92.025,86.496 92.372,86.149 92.372,85.503 C17.1 92.35,85.275 v1(92.35,84.475) ; v1@93.125,77.225 93.875,77.55 C9.1 94.142,77.767 94.65,77.767 94.883,78 ; v1(96.425,87.025) 96.559,86.608 ccw(c96.844,86.7) 96.844,86.4 98,86.4 R7.1 ; v1(96.7,84.75) 96.7,84.642 96.85,84.492 96.85,83.975 C12.1 97,83.025 96.75,82.775 ; C6.1 99.1,73.325 v1(99.65,72.35) ; 101.278,74.8 101.568,74.51 101.568,73.932 C10.1 101.575,73.7 v1(101.575,73.05) ; 103,81 103.394,81.393 C11.1@104.007,81.393 ; v1(103.775,74.025) 103.775,74.775 R4.1 ; C11.1 104.402,81.375 ccw(c104.402,81.675) 104.64,81.493 v1(105.45,82.55) ; v1(105,95.625) 105.974,96.228 cw(c106.132,95.973) 106.139,96.273 106.767,96.257 cw(c106.759,95.957) 107.059,95.957 107.059,95.65 C5.1 106.15,95.45 105.749,95.049 105.749,93.359 107.372,91.736 107.372,91.378 J2.5 ; v1(112.025,81.45) 113.15,81.45 J1.5
  Top Layer w0.5: v1(86.95,75.45) X1.4 ; v1(87.35,77.275) 88.45,77.275 C13.1 ; v1(90.4,80.35) 90.412,80.337 91.813,80.337 C7.1 93.575,80.325 93.75,80.5 C8.1 ; v1(90.95,72.125) 90.95,73.25 X1.2 ; C14.1 92.05,77.2 92.05,76.629 92.4,76.279 v1(92.4,76.225) ; J3.1 v1(100.125,62.275) ; C3.1 108.75,72.225 v1(110,72.225) ; v1(110.3,73.525) 110.3,74.725 C2.1 ; v1(110.525,66.075) 110.525,67.17 U1.1 ; v1(111.875,73.5) C1.1 ; C4.1 113.3,66.7 v1(113.3,68.05) ; R1.1 v1(116.1,68.825)
  other v1: 93.075,76.975
  other v2: 90,60 95,60 100,60 87.5,65 92.5,65 97.5,65 102.5,65 107.5,65 85,70 90,70 95,70 100,70 105,70 87.5,75 92.5,75 97.5,75 102.5,75 107.5,75 85,80 90,80 95,80 100,80 105,80 110,80 87.5,85 92.5,85 97.5,85 102.5,85 107.5,85 112.5,85 85,90 90,90 95,90 100,90 105,90 110,90
  other v3: 96.8,76.55 97.9,76.55 99,76.55 100.1,76.55 101.2,76.55 96.8,77.65 97.9,77.65 99,77.65 100.1,77.65 101.2,77.65 96.8,78.75 97.9,78.75 99,78.75 100.1,78.75 101.2,78.75 96.8,79.85 97.9,79.85 99,79.85 100.1,79.85 101.2,79.85 96.8,80.95 97.9,80.95 99,80.95 100.1,80.95 101.2,80.95
IMU_CPOUT: C15.2 U3.20 | length 1.6
  Top Layer w0.25: C15.2 91.988,92.537 91.988,90.987 U3.20
IMU_INT: U2.45 U3.12 | length 8.9
  Top Layer w0.25: U3.12 92.5,86.775 93,86.275 93.75,86.275 94.55,85.475 97.125,85.475 97.721,84.355 cw(c97.5,84.238) 97.75,84.238 U2.45
IMU_REGOUT: C17.2 U3.10 | length 1.6
  Top Layer w0.25: C17.2 91.516,85.591 U3.10@91.516,87.009
IMU_SCL: R2.1 U2.42 U3.23 | length 24.4
  Top Layer w0.2: U3.23 90.5,91.8 90.667,91.967 90.833,91.967 90.975,92.109 v1(90.975,92.4) ; v1(97.575,94.225) 98.925,94.225 100.375,92.775 R2.1 100.375,84.15 99.25,83.025 U2.42
  Bottom Layer w0.2: v1(90.975,92.4) 90.975,93.8 91.4,94.225 v1(97.575,94.225)
IMU_SDA: R3.1 U2.43 U3.24 | length 22.2
  Top Layer w0.2: U3.24 90,92.865 90.533,93.398 98.402,93.398 99.125,92.674 R3.1 99.103,87.753 99.103,84.453 98.75,84.1 U2.43
LED_PWR_K: D1.K R1.2 | length 1.7
  Top Layer w0.25: D1.K R1.2
MCU_BOOT0: R7.2 U2.44 | length 3.2
  Top Layer w0.25: R7.2 98.25,85.325 U2.44
MCU_LED_A: D2.A U2.26 | length 1.4
  Top Layer w0.25: U2.26 D2.A
MCU_LED_K: D2.K R4.2 | length 1.6
  Top Layer w0.25: D2.K 104.787,76.463 104.787,75.013 R4.2
MCU_NRST: C5.2 J2.3 R5.1 U2.7 | length 42.9
  Top Layer w0.25: v4(93.05,78.075) 93.475,78.5 U2.7 ; C5.2 108.138,95.462 R5.1@110.762,95.462 ; v1(108.625,96.85) 110.278,96.85 110.775,96.353 R5.1 R5.1@110.762,95.462 ; J2.3 109.7,92.22 109.7,94.325 110.1,94.725 110.579,94.725 110.725,94.871 110.725,95.425 R5.1@110.762,95.462
  Bottom Layer w0.25: v4(93.05,78.075) 93.079,78.104 93.079,81.213 103.396,87.751 103.625,96.075 104.4,96.85 v1(108.625,96.85)
MCU_OSC_IN: C13.2 U2.5 X1.1 | length 13
  Top Layer w0.2: C13.2 89.55,77.3 89.55,79.125 89.925,79.5 U2.5
  Top Layer w0.25: X1.1 89.65,73.55 89.825,73.725 89.825,76.275 89.5,76.6 C13.2
MCU_OSC_OUT: R6.1 U2.6 | length 3.8
  Top Layer w0.2: R6.1 92.2,78.545 92.519,78.545 92.904,79 U2.6
MCU_PA4: J3.5 U2.14 | length 16.4
  Top Layer w0.25: J3.5 95.125,72.6 96.75,74.225 U2.14
MCU_PA5: J3.3 U2.15 | length 16.7
  Top Layer w0.25: v1(96.25,70.5) 96.325,70.575 96.325,71.15 97.249,72.074 U2.15@97.249,75.074 ; U2.15@97.25,75.075 U2.15
  Top Layer w0.3: v1(97.605,66.909) 97.615,66.9 97.615,59.61 J3.3
  Bottom Layer w0.3: v1(96.25,70.5) 96.25,69.825 97.625,68.45 97.625,66.929 v1(97.605,66.909)
MCU_PA6: J3.4 U2.16 | length 16.3
  Top Layer w0.25: J3.4 96.375,68.575 97.625,69.825 97.625,74.45 97.75,74.575 U2.16
MCU_PA7: J3.2 U2.17 | length 16.1
  Top Layer w0.25: U2.17 98.25,74.525 98.1,74.375 98.1,72.85 98.85,72.1 98.85,59.625 J3.2
MCU_SWCLK: J2.4 U2.37 | length 13.8
  Top Layer w0.25: U2.37 101.75,82.729 101.896,82.875 102.825,82.875 106.225,86.275 109.05,86.275 109.75,86.975 109.75,89.098 108.848,90 J2.4
MCU_SWDIO: J2.2 U2.34 | length 21.7
  Top Layer w0.25: U2.34 104.401,80.5 109.25,85.349 109.25,85.354 109.396,85.5 113.4,85.5 114.175,86.275 114.175,89.375 113.897,89.653 110.974,89.653 110.644,89.983 110.037,89.983 J2.2
MCU_SWO: J2.6 U2.39 | length 10.6
  Top Layer w0.2: 104.525,86.675 107.103,89.253 107.103,89.551 107.48,89.929 J2.6
  Top Layer w0.25: U2.39 100.75,82.9 104.525,86.675
MCU_VCAP1: C6.2 U2.22 | length 1.9
  Top Layer w0.25: C6.2 100.35,74.475 100.6,74.725 100.75,74.725 U2.22
USB_D_N: J1.2 U2.32 | length 11.7
  Top Layer w0.2: U2.32 104.782,79.5 105.257,79.975 109.505,79.975 109.905,79.575 113.6,79.575 J1.2
USB_D_P: J1.3 U2.33 | length 11.7
  Top Layer w0.2: U2.33 104.575,80 105.05,80.475 109.712,80.475 110.113,80.075 113.6,80.075 J1.3
VBUS: C1.2 FB1.1 J1.1
XTAL_IN: C14.2 R6.2 X1.3 | length 3.1
  Top Layer w0.254: X1.3 91,75.873 C14.2 R6.2
pads on no net: J1.4 J1.MH1 J1.MH2 J1.Shell J2.MH J3. U2.2 U2.3 U2.4 U2.10 U2.11 U2.12 U2.13 U2.18 U2.19 U2.20 U2.21 U2.25 U2.27 U2.28 U2.29 U2.30 U2.31 U2.38 U2.40 U2.41 U2.46 U3.2 U3.3 U3.4 U3.5 U3.6 U3.7 U3.14 U3.15 U3.16 U3.17 U3.19 U3.21 U3.22 U3.25
copper on no net:
  other v3: 90.7,88.45 91.8,88.45 90.7,89.55 91.8,89.55

## Polygon pours and split planes (outlines as drawn)
+3V3 on Top Layer "+3V3_L01_P002" (solid, pour order 2): 109.975,60.1 110.525,60.125 112.425,62.725 114.3,62.85 114.425,63.2 114.425,64.8 114.2,65.025 109.775,65.05 109.1,65.05 109.075,68.35 107.45,68.35 107.4,63.025 106.1,63 106.15,60.1 106.425,60.1
GND on Top Layer "GND_L01_P005" (solid, pour order 5): 112.9,75.35 109.8,75.4 109.7,75.225 109.725,73.8 109.35,73.275 107.575,73.275 107.4,72.925 107.4,71.05 107.6,70.8 109.525,70.75 109.85,70.75 109.775,65.725 110.1,65.3 114.3,65.3 114.6,65.7 114.65,67.2 114.825,67.35 116.725,67.325 116.9,67.575 116.9,69.3 116.7,69.775 112.975,69.725 112.9,75.325
+5V on Top Layer "+5V_L01_P001" (solid, pour order 1): 109.6,76.075 107.55,74.15 106.75,74.125 106.725,73.575 105.075,73.6 104.525,73.05 104.55,66.9 105.125,66.525 106.575,66.525 107.025,66.825 106.95,72.8 107.325,73.5 107.725,73.55 109.821,75.805 ccw(c109.875,76.075) 109.875,75.8 110.65,75.8 ccw(c110.65,76.225) 111.075,76.225 111.075,78.275 ccw(c110.725,78.275) 110.725,78.625 110,78.625 ccw(c109.999,78.219) 109.594,78.219 109.589,77.945 109.6,77.088
VBUS on Top Layer "VBUS_L01_P000" (solid, pour order 0): 111.275,78.7 111.275,75.975 111.375,75.875 112.425,75.875 112.525,75.975 112.525,78.2 112.875,78.55 114.475,78.55 114.475,79.15 111.725,79.15
GND on L2 (GND) "GND_L02_P003" (solid, pour order 3): 83.5,95.5 cw(c85.5,95.5) 85.5,97.5 116,97.5 cw(c116,96) 117.5,96 117.5,58.5 cw(c116.5,58.5) 116.5,57.5 86,57.5 cw(c86,60) 83.5,60 83.5,73.5
GND on L3 (GND) "GND_L03_P004" (solid, pour order 4): 83.5,95.5 cw(c85.5,95.5) 85.5,97.5 116,97.5 cw(c116,96) 117.5,96 117.5,58.5 cw(c116.5,58.5) 116.5,57.5 86,57.5 cw(c86,60) 83.5,60 83.5,73.5

## Silkscreen, mask and mechanical layers (free items; w line width, h text height)
Top Overlay:
  drawing of 53 lines, arcs and shapes, not listed
  text "PKNW PITIGALA" at 88.927,95.3 h1.2
  text "SWD" at 107.625,85.325 h1
  text "USB" at 114.467,73.375 h1
  text "GPIO" at 95.101,64.65 h1
Mechanical 1:
  lines w0.5: 83,58.27 ccw(c84.27,58.27) 84.27,57 116.73,57 ccw(c116.73,58.27) 118,58.27 118,96.73 ccw(c116.73,96.73) 116.73,98 84.27,98 ccw(c84.27,96.73) 83,96.73 83,90 83,58.27

## Text inside footprints (layer, text, board x,y; h text height)
D1: Mechanical 13 "+" at 115.592,62.642 h0.5 r90
D2: Mechanical 13 "+" at 102.367,77.008 h0.5
J1: Top 3D Body "PCB Edge" at 118.45,78.95 h0.41 r90